# Altium PCB A4.PcbDoc (part 2 of 2)
Units mil, origin at the board's own origin, x right, y up, seen from the top; angles counter-clockwise.
Board outline 3937.01 x 3149.61 mil, 2 copper layers (Top Layer, Bottom Layer); 93 components, 53 nets, 268 pads, 22 vias.
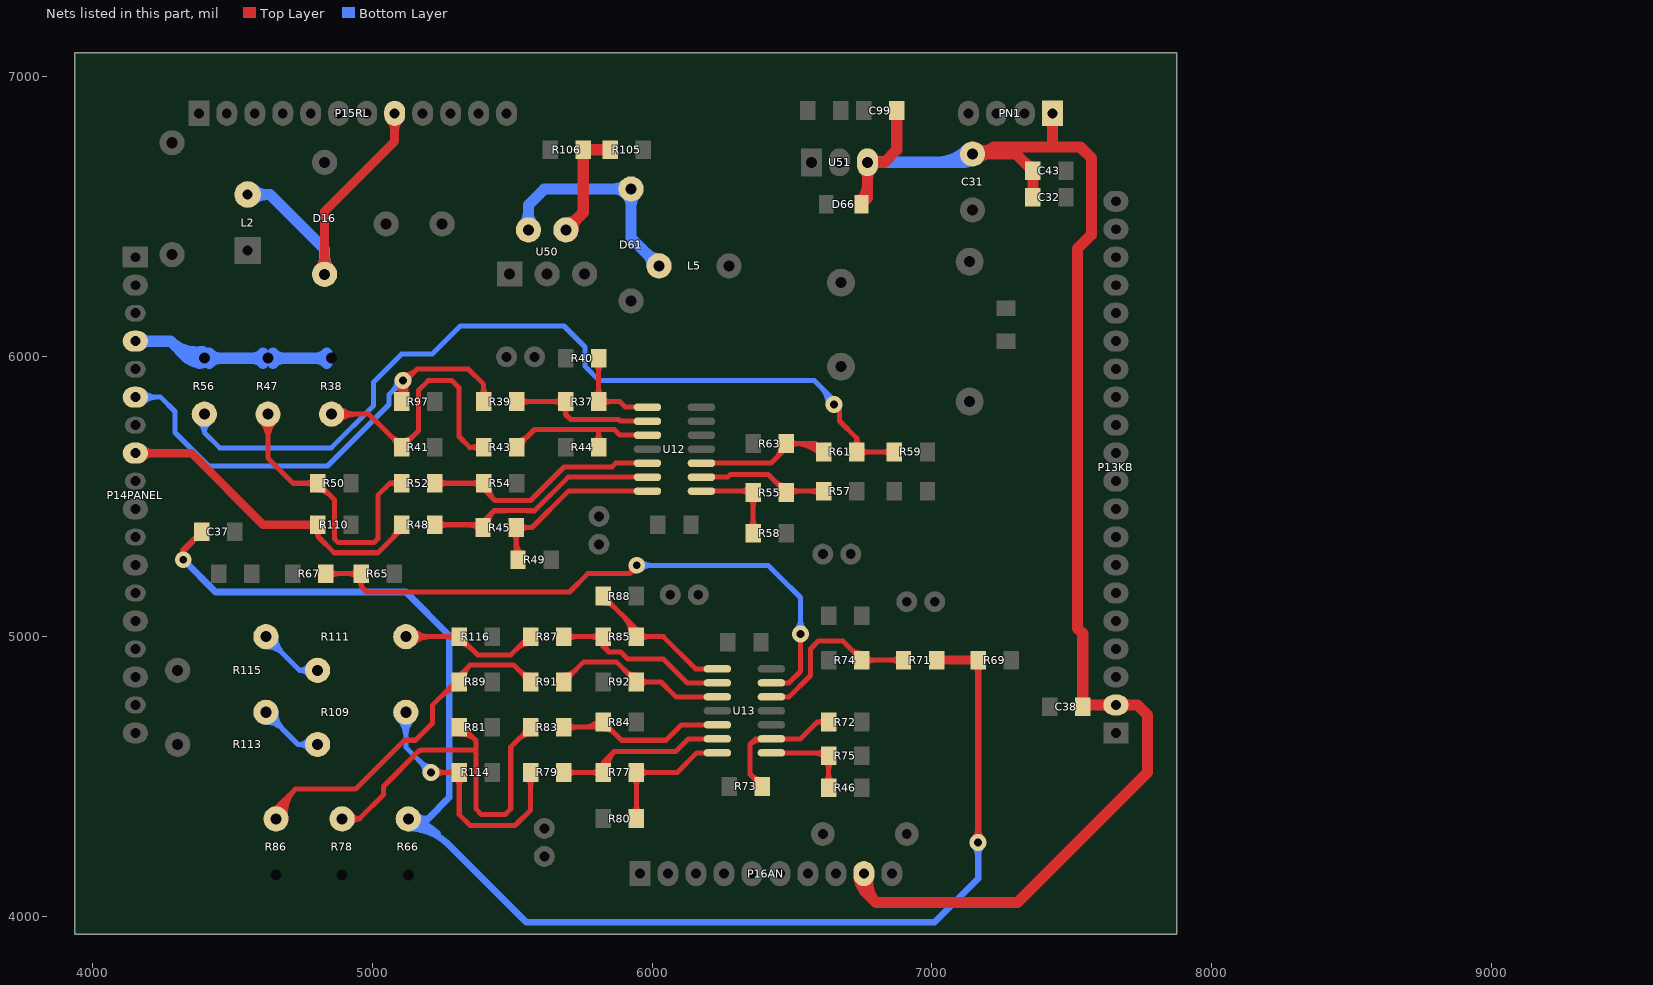
[diagram p2: the nets of this part, all layers, seen from the top]

## Via types
v1: diameter 60, hole 28, Top Layer to Bottom Layer, 21 vias
v2: diameter 90, hole 39.37, Top Layer to Bottom Layer, 1 vias

## Nets (pads, with @x,y where several pads share a name; then routed paths per layer and width w, separated by ;. In a path a pad name is that pad's centre, name@x,y a point inside that pad or via, vN(x,y) a via of type N, cw(c..) or ccw(c..) an arc to the next point about the centre after c; other vN are vias at no path point) (continued)
N: P14PANEL.4 R38.1 R47.1 R56.1 | length 2412
  Bottom Layer w40: P14PANEL.4@4153.54,6055.91 4279.09,6055.91 ; P14PANEL.4@4173.42,6043.53 cw(c4203.29,6013.66) 4203.29,6055.91 cw(c4203.29,6098.15) P14PANEL.4@4173.42,6068.28 ; 4333.02,6001.98 ccw(c4388.58,6057.53) R56.1@4402.7,5980.24 ; R56.1@4382.25,5977.4 ccw(c4340,5935.51) 4340,5995 ; R56.1@4382.25,6012.6 cw(c4340,6054.49) 4340,5995 ; R56.1@4395.51,6019.59 cw(c4371.92,6148.72) 4279.1,6055.9 ; R56.1@4417.68,5977.32 cw(c4460.36,5934.64) 4460.36,5995 cw(c4460.36,6055.36) R56.1@4417.68,6012.68 ; R47.1@4609.82,5977.32 ccw(c4567.14,5934.64) 4567.14,5995 ccw(c4567.14,6055.36) R47.1@4609.82,6012.68 ; R38.1@4850,5995 R47.1@4627.5,5995 R56.1@4400,5995 4340,5995 ; 4279.09,6055.91 4340,5995 ; R47.1@4645.18,5977.32 cw(c4687.86,5934.64) 4687.86,5995 ; R47.1@4645.18,5977.32 cw(c4687.86,5934.64) 4687.86,5995 ; R47.1@4645.18,5977.32 cw(c4687.86,5934.64) 4687.86,5995 ; R47.1@4645.18,5977.32 cw(c4687.86,5934.64) 4687.86,5995 ; R47.1@4645.18,5977.32 cw(c4687.86,5934.64) 4687.86,5995 ; R47.1@4645.18,5977.32 cw(c4687.86,5934.64) 4687.86,5995 ; R47.1@4645.18,6012.68 ccw(c4687.86,6055.36) 4687.86,5995 ; R47.1@4645.18,6012.68 ccw(c4687.86,6055.36) 4687.86,5995 ; R47.1@4645.18,6012.68 ccw(c4687.86,6055.36) 4687.86,5995 ; R47.1@4645.18,6012.68 ccw(c4687.86,6055.36) 4687.86,5995 ; R47.1@4645.18,6012.68 ccw(c4687.86,6055.36) 4687.86,5995 ; R47.1@4645.18,6012.68 ccw(c4687.86,6055.36) 4687.86,5995 ; 4794.64,5995 ccw(c4794.64,6055.36) R38.1@4837.32,6012.68 ; 4794.64,5995 cw(c4794.64,5934.64) R38.1@4837.32,5977.32 ; 4794.64,5995 ccw(c4794.64,6055.36) R38.1@4837.32,6012.68 ; 4794.64,5995 cw(c4794.64,5934.64) R38.1@4837.32,5977.32 ; 4794.64,5995 ccw(c4794.64,6055.36) R38.1@4837.32,6012.68 ; 4794.64,5995 cw(c4794.64,5934.64) R38.1@4837.32,5977.32 ; 4794.64,5995 ccw(c4794.64,6055.36) R38.1@4837.32,6012.68 ; 4794.64,5995 cw(c4794.64,5934.64) R38.1@4837.32,5977.32 ; 4794.64,5995 ccw(c4794.64,6055.36) R38.1@4837.32,6012.68 ; 4794.64,5995 cw(c4794.64,5934.64) R38.1@4837.32,5977.32 ; 4794.64,5995 ccw(c4794.64,6055.36) R38.1@4837.32,6012.68 ; 4794.64,5995 cw(c4794.64,5934.64) R38.1@4837.32,5977.32
NetC37_1: C37.1 R66.2 R69.1 R71.2 | length 5620.3
  Top Layer w24: v1(4325,5275) 4325,5309.06 C37.1@4390.94,5375 ; v1@7152.27,4277.73 ccw(c7121.54,4308.46) 7165,4308.46 ccw(c7208.46,4308.46) v1@7177.73,4277.73 ; R69.1@7154.94,4899.34 cw(c7130.66,4875.06) 7165,4875.06 ; v1@7160,4280 7165,4285 7165,4915.31 R69.1@7165.94,4916.25 ; 7165,4870.5 cw(c7205.79,4870.5) R69.1@7176.95,4899.34
  Top Layer w32: R71.2@7016.56,4916.25 R69.1@7165.94,4916.25 ; R71.2@7024.73,4908.08 cw(c7044.46,4888.34) 7044.46,4916.25 cw(c7044.46,4944.16) R71.2@7024.73,4924.42 ; R69.1@7157.77,4908.08 ccw(c7138.04,4888.34) 7138.04,4916.25 ccw(c7138.04,4944.16) R69.1@7157.77,4924.42
  Bottom Layer w24: v1(4325,5275) 4440,5160 5120,5160 5275,5005 5275,4425 5199.13,4349.13 R66.2@5128.82,4349.13 ; R66.2@5128.82,4316.13 cw(c5128.82,4110.81) 5274,4256 5550,3980 7010,3980 7165,4135 7165,4221.54 ; R66.2@5128.82,4340.13 cw(c5128.82,4192.75) 5233.03,4296.97 ; R66.2@5128.82,4364.13 cw(c5128.82,4274.69) 5192.06,4337.94 ; R66.2@5158.67,4335.06 cw(c5180.86,4324.59) 5180.86,4349.13 cw(c5180.86,4373.68) R66.2@5158.67,4363.21 ; v1@7152.27,4252.27 cw(c7121.54,4221.54) 7165,4221.54 ; v1(7165,4265) 7165,4221.54 ; v1@7177.73,4252.27 ccw(c7208.46,4221.54) 7165,4221.54
NetD61_2: D61.2 L5.1 U50.2 | length 1175.5
  Bottom Layer w40: U50.2@5540.39,6471.42 ccw(c5497.72,6514.1) 5558.07,6514.1 ccw(c5618.43,6514.1) U50.2@5575.75,6471.42 ; U50.2@5558.07,6453.74 5558.07,6543.07 5615,6600 D61.2@5925,6600 5925,6425 L5.1@6025,6325 ; D61.2@5907.32,6617.68 cw(c5864.64,6660.36) 5864.64,6600 cw(c5864.64,6539.64) 5907.32,6582.32 cw(c5864.64,6539.64) 5925,6539.64 cw(c5985.36,6539.64) D61.2@5942.68,6582.32 ; L5.1@6000,6325 ccw(c5939.64,6325) 5982.32,6367.68 ccw(c6025,6410.36) L5.1@6025,6350
NetR37_1: R37.1 R40.2 U12.1 | length 548.9
  Top Layer w18: R37.1@5795.93,5859.03 ccw(c5764.25,5890.71) 5809.06,5890.71 ccw(c5853.86,5890.71) R37.1@5822.18,5859.03 ; R40.2@5795.93,5975.97 cw(c5764.25,5944.29) 5809.06,5944.29 cw(c5853.86,5944.29) R40.2@5822.18,5975.97 ; R40.2@5809.06,5995 R37.1@5809.06,5840 5885,5840 5905,5820 U12.1@5983.54,5820 ; R37.1@5822.18,5826.88 cw(c5853.86,5795.19) 5853.86,5840 cw(c5853.86,5884.81) R37.1@5822.18,5853.12
NetR37_2: R37.2 R39.1 U12.2 | length 722.5
  Top Layer w18: R39.1@5516.56,5840 R37.2@5690.94,5840 5690.94,5794.06 ; R39.1@5529.68,5826.88 cw(c5561.36,5795.19) 5561.36,5840 cw(c5561.36,5884.81) R39.1@5529.68,5853.12 ; R37.2@5677.82,5826.88 ccw(c5646.14,5795.19) 5646.14,5840 ccw(c5646.14,5884.81) R37.2@5677.82,5853.12 ; R37.2@5678.95,5819.93 cw(c5657.04,5794.06) 5690.94,5794.06 ; R37.2@5702.94,5819.93 ccw(c5724.85,5794.06) 5690.94,5794.06 ; U12.2@5983.54,5770 5885.91,5770 5879.91,5776 5709,5776 5690.94,5794.06
NetR38_2: R38.2 R41.1 R43.2 | length 1395.1
  Top Layer w18: R38.2@4855,5795 4987.61,5795 5017.61,5765 5042.61,5740 R41.1@5105.94,5676.67 5165,5735.72 5165,5880.15 5199.85,5915 5285,5915 5310,5890 5310,5715 5348.33,5676.67 R43.2@5398.44,5676.67 ; R38.2@4880.46,5769.54 cw(c4941.91,5708.09) 4941.91,5795 cw(c4941.91,5881.91) R38.2@4880.46,5820.46 ; R41.1@5124.5,5682.57 cw(c5155.05,5682.57) R41.1@5133.45,5704.17 ; 5147.71,5718.43 cw(c5105.94,5760.19) R41.1@5105.94,5701.13 ; R43.2@5385.32,5663.54 ccw(c5353.64,5631.86) 5353.64,5676.67 ccw(c5353.64,5721.47) R43.2@5385.32,5689.79 ; R41.1@5105.94,5701.13 cw(c5105.94,5760.19) 5064.18,5718.43 ccw(c5105.94,5760.19) R41.1@5105.94,5701.13 ; R41.1@5078.44,5704.17 cw(c5056.84,5682.57) 5087.39,5682.57 ccw(c5056.84,5682.57) R41.1@5078.44,5704.17
NetR43_1: R43.1 R44.2 U12.3 | length 706
  Top Layer w18: R43.1@5516.56,5676.67 5579.89,5740 5810,5740 ; R43.1@5516.56,5701.13 ccw(c5516.55,5760.19) 5558.32,5718.43 ; R43.1@5535.12,5682.57 cw(c5565.66,5682.57) R43.1@5544.06,5704.17 ; R44.2@5795.93,5695.69 ccw(c5764.25,5727.38) 5809.06,5727.38 ccw(c5853.86,5727.38) R44.2@5822.18,5695.69 ; R44.2@5809.06,5676.67 5809.06,5739.06 5810,5740 ; U12.3@5983.54,5720 5885,5720 5865,5740 5810,5740
NetR45_1: R45.1 R49.2 U12.7 | length 1284.9
  Top Layer w18: R49.2@5514.06,5261.89 R45.1@5514.06,5390 5570.91,5390 5700.91,5520 U12.7@5983.54,5520 ; R45.1@5527.18,5376.88 cw(c5558.86,5345.19) 5558.86,5390 cw(c5558.86,5434.81) R45.1@5527.18,5403.12 ; R45.1@5500.93,5370.97 cw(c5469.25,5339.29) 5514.06,5339.29 ; R45.1@5500.93,5370.97 cw(c5469.25,5339.29) 5514.06,5339.29 ; R45.1@5500.93,5370.97 cw(c5469.25,5339.29) 5514.06,5339.29 ; R45.1@5500.93,5370.97 cw(c5469.25,5339.29) 5514.06,5339.29 ; R49.2@5507.82,5294.03 ccw(c5492.77,5309.08) 5514.06,5309.08 ; R49.2@5507.82,5294.03 ccw(c5492.77,5309.08) 5514.06,5309.08 ; R49.2@5507.82,5294.03 ccw(c5492.77,5309.08) 5514.06,5309.08 ; R49.2@5507.82,5294.03 ccw(c5492.77,5309.08) 5514.06,5309.08 ; 5514.06,5339.29 cw(c5558.86,5339.29) R45.1@5527.18,5370.97 ; 5514.06,5339.29 cw(c5558.86,5339.29) R45.1@5527.18,5370.97 ; 5514.06,5339.29 cw(c5558.86,5339.29) R45.1@5527.18,5370.97 ; 5514.06,5339.29 cw(c5558.86,5339.29) R45.1@5527.18,5370.97 ; 5514.06,5342.34 ccw(c5582.38,5342.34) R49.2@5534.07,5294.03 ; 5514.06,5342.34 ccw(c5582.38,5342.34) R49.2@5534.07,5294.03 ; 5514.06,5342.34 ccw(c5582.38,5342.34) R49.2@5534.07,5294.03 ; 5514.06,5342.34 ccw(c5582.38,5342.34) R49.2@5534.07,5294.03
NetR45_2: R45.2 R48.1 U12.6 | length 2041.7
  Top Layer w18: R48.1@5216.56,5400 R48.1@5224.06,5400 R45.2@5395.94,5400 ; R45.2@5395.94,5390 R45.2@5395.94,5400 ; R45.2@5398.44,5400 R45.2@5395.94,5400 ; R45.2@5414.48,5396.82 cw(c5484.73,5400.26) 5435,5450 ; U12.6@5983.54,5570 5700,5570 5580,5450 5553.26,5450 5553.26,5450.46 5475.31,5450.46 5474.85,5450 5435,5450 ; R48.1@5237.18,5386.88 cw(c5268.86,5355.19) 5268.86,5400 ; R48.1@5237.18,5386.88 cw(c5268.86,5355.19) 5268.86,5400 ; R48.1@5237.18,5386.88 cw(c5268.86,5355.19) 5268.86,5400 ; R48.1@5237.18,5386.88 cw(c5268.86,5355.19) 5268.86,5400 ; R48.1@5237.18,5386.88 cw(c5268.86,5355.19) 5268.86,5400 ; R48.1@5237.18,5386.88 cw(c5268.86,5355.19) 5268.86,5400 ; R48.1@5237.18,5386.88 cw(c5268.86,5355.19) 5268.86,5400 ; R48.1@5237.18,5386.88 cw(c5268.86,5355.19) 5268.86,5400 ; R48.1@5237.18,5413.12 ccw(c5268.86,5444.81) 5268.86,5400 ; R48.1@5237.18,5413.12 ccw(c5268.86,5444.81) 5268.86,5400 ; R48.1@5237.18,5413.12 ccw(c5268.86,5444.81) 5268.86,5400 ; R48.1@5237.18,5413.12 ccw(c5268.86,5444.81) 5268.86,5400 ; R48.1@5237.18,5413.12 ccw(c5268.86,5444.81) 5268.86,5400 ; R48.1@5237.18,5413.12 ccw(c5268.86,5444.81) 5268.86,5400 ; R48.1@5237.18,5413.12 ccw(c5268.86,5444.81) 5268.86,5400 ; R48.1@5237.18,5413.12 ccw(c5268.86,5444.81) 5268.86,5400 ; 5341.25,5400 cw(c5341.25,5341.22) R45.2@5382.82,5382.78 ; 5341.25,5400 cw(c5341.25,5341.22) R45.2@5382.82,5382.78 ; 5341.25,5400 cw(c5341.25,5341.22) R45.2@5382.82,5382.78 ; 5341.25,5400 cw(c5341.25,5341.22) R45.2@5382.82,5382.78 ; 5341.25,5400 cw(c5341.25,5341.22) R45.2@5382.82,5382.78 ; 5341.25,5400 cw(c5341.25,5341.22) R45.2@5382.82,5382.78 ; 5341.25,5400 cw(c5341.25,5341.22) R45.2@5382.82,5382.78 ; 5341.25,5400 cw(c5341.25,5341.22) R45.2@5382.82,5382.78 ; 5361.02,5400 ccw(c5361.02,5430.83) R45.2@5382.82,5409.03 ; 5361.02,5400 ccw(c5361.02,5430.83) R45.2@5382.82,5409.03 ; 5361.02,5400 ccw(c5361.02,5430.83) R45.2@5382.82,5409.03 ; 5361.02,5400 ccw(c5361.02,5430.83) R45.2@5382.82,5409.03 ; 5361.02,5400 ccw(c5361.02,5430.83) R45.2@5382.82,5409.03 ; 5361.02,5400 ccw(c5361.02,5430.83) R45.2@5382.82,5409.03 ; 5361.02,5400 ccw(c5361.02,5430.83) R45.2@5382.82,5409.03 ; 5361.02,5400 ccw(c5361.02,5430.83) R45.2@5382.82,5409.03 ; R45.2@5395.94,5400 5395.94,5410.94 5435,5450
NetR46_1: R46.1 R75.1 U13.8 | length 552.6
  Top Layer w18: U13.8@6426.46,4585 6617.19,4585 6630.94,4571.25 R46.1@6630.94,4460 R46.1@6630.94,4440 ; 6576.25,4585 cw(c6576.25,4526.22) R75.1@6617.82,4567.78 ; 6596.02,4585 ccw(c6596.02,4615.83) R75.1@6617.82,4594.03 ; R46.1@6617.82,4479.03 ccw(c6586.14,4510.71) 6630.94,4510.71 ccw(c6675.75,4510.71) R46.1@6644.07,4479.03 ; R75.1@6617.82,4555.97 cw(c6586.14,4524.29) 6630.94,4524.29 cw(c6675.75,4524.29) R75.1@6644.07,4555.97
NetR47_2: R47.2 R50.1 R52.2 | length 1363.6
  Top Layer w18: R47.2@4602.04,5769.54 cw(c4540.59,5708.09) 4627.5,5708.09 cw(c4714.41,5708.09) R47.2@4652.96,5769.54 ; R47.2@4627.5,5795 4627.5,5637.5 4716.67,5548.33 R50.1@4805.94,5548.33 4865,5489.28 4865,5350 4879,5336 5006,5336 5020,5350 5020,5505 5063.33,5548.33 ; R50.1@4792.82,5535.21 ccw(c4761.14,5503.53) 4761.14,5548.33 ccw(c4761.14,5593.14) R50.1@4792.82,5561.46 ; R50.1@4805.94,5523.87 cw(c4805.94,5464.81) 4847.71,5506.57 ; R50.1@4824.5,5542.43 ccw(c4855.05,5542.43) R50.1@4833.45,5520.83 ; R52.2@5092.35,5535.69 ccw(c5063.34,5508.7) 5063.34,5548.33 ; R52.2@5092.35,5560.97 cw(c5063.34,5587.96) 5063.34,5548.33 ; R52.2@5105.94,5548.33 5063.33,5548.33
NetR52_1: R52.1 R54.2 U12.5 | length 1093.5
  Top Layer w18: R52.1@5216.56,5548.33 R52.1@5224.06,5548.33 R54.2@5398.44,5548.33 5398.44,5526.56 5439,5486 ; R52.1@5237.18,5535.21 cw(c5268.86,5503.53) 5268.86,5548.33 cw(c5268.86,5593.14) R52.1@5237.18,5561.46 ; R54.2@5385.32,5535.21 ccw(c5353.64,5503.53) 5353.64,5548.33 ccw(c5353.64,5593.14) R54.2@5385.32,5561.46 ; R54.2@5399,5542.41 ccw(c5435.55,5541.16) R54.2@5409.69,5515.31 ; R54.2@5416.99,5541.8 ccw(c5492.23,5539.23) 5439,5486 ; U12.5@5983.54,5620 5870,5620 5856,5606 5685.09,5606 5565.55,5486.46 5460.4,5486.46 5459.94,5486 5439,5486
NetR55_1: R55.1 R58.2 U12.8 | length 542.7
  Top Layer w18: U12.8@6176.46,5520 6355.94,5520 R55.1@6360.94,5515 R58.2@6360.94,5370 ; 6313.95,5520 ccw(c6313.95,5567.9) R55.1@6347.82,5534.03 ; 6318.32,5520 cw(c6318.32,5478.29) R55.1@6347.82,5507.78 ; R58.2@6347.82,5389.03 ccw(c6316.14,5420.71) 6360.94,5420.71 ccw(c6405.75,5420.71) R58.2@6374.07,5389.03 ; R55.1@6347.82,5495.97 cw(c6316.14,5464.29) 6360.94,5464.29 cw(c6405.75,5464.29) R55.1@6374.07,5495.97
NetR55_2: R55.2 R57.1 U12.9 | length 681.3
  Top Layer w18: U12.9@6176.46,5570 6270,5570 6280,5580 6414.06,5580 R55.2@6479.06,5515 6484.06,5520 R57.1@6613.44,5520 ; 6437.29,5556.76 ccw(c6479.06,5598.53) R55.2@6479.06,5539.46 ; R55.2@6451.55,5542.51 cw(c6429.95,5520.91) R55.2@6460.5,5520.91 ; R55.2@6492.18,5507.78 cw(c6521.68,5478.29) 6521.68,5520 ; R55.2@6492.18,5534.03 ccw(c6526.05,5567.9) 6526.05,5520 ; R57.1@6600.32,5506.88 ccw(c6568.64,5475.19) 6568.64,5520 ccw(c6568.64,5564.81) R57.1@6600.32,5533.12
NetR56_2: R56.2 R59.1 R61.2 | length 3464
  Top Layer w18: v1(6650,5830) 6670,5810 6670,5770.91 6731.56,5709.36 ; R61.2@6718.72,5679.31 ccw(c6689.98,5709.35) 6731.56,5709.35 ; R61.2@6744.39,5679.31 cw(c6773.13,5709.35) 6731.56,5709.35 ; R61.2@6744.68,5646.88 cw(c6776.36,5615.19) 6776.36,5660 cw(c6776.36,5704.81) R61.2@6744.68,5673.12 ; R59.1@6852.82,5646.88 ccw(c6821.14,5615.19) 6821.14,5660 ccw(c6821.14,5704.81) R59.1@6852.82,5673.12 ; R59.1@6865.94,5660 R61.2@6731.56,5660 6731.56,5709.36
  Bottom Layer w18: R56.2@4380.9,5764.48 cw(c4359.32,5730) 4400,5730 ; R56.2@4400,5795 4400,5730 ; R56.2@4419.1,5764.48 ccw(c4440.68,5730) 4400,5730 ; 6603.54,5891.46 cw(c6542.09,5830) v1@6629,5830 ; 6634.27,5860.73 cw(c6603.54,5830) v1@6647,5830 ; v1(6650,5830) 6650,5845 6580,5915 5810.91,5915 5760,5965.91 5760,6035 5685,6110 5670.91,6110 5669.91,6111 5640.09,6111 5639.09,6110 5315,6110 5215,6010 5105,6010 5005,5910 5005,5825.91 4854.09,5675 4455,5675 4400,5730
NetR61_1: R61.1 R63.2 U12.10 | length 844.8
  Top Layer w18: U12.10@6176.46,5620 6425,5620 6479.06,5674.06 R63.2@6479.06,5690 6583.44,5690 ; 6440.28,5635.28 ccw(c6391.46,5684.09) R63.2@6460.5,5684.09 ; R63.2@6464.51,5659.51 cw(c6479.06,5644.97) R63.2@6479.06,5665.54 ; R63.2@6492.18,5676.88 cw(c6523.86,5645.19) 6523.86,5690 cw(c6523.86,5734.81) R63.2@6492.18,5703.12 ; 6510.47,5690 cw(c6510.47,5562.93) R61.1@6600.32,5652.78 ; 6553.93,5690 cw(c6553.93,5606.39) R61.1@6613.05,5665.51 ; R61.1@6585.94,5687.51 cw(c6564.34,5665.91) R61.1@6594.89,5665.91 ; R61.1@6608.19,5683.7 cw(c6601.11,5707.66) 6583.45,5690 ; R61.1@6613.44,5660 6583.44,5690
NetR65_2: R65.2 R67.1 U13.13 | length 2706.5
  Top Layer w18: R67.1@4834.06,5225 R65.2@4960.94,5225 4960.94,5179.06 ; R67.1@4847.18,5211.88 cw(c4878.86,5180.19) 4878.86,5225 cw(c4878.86,5269.81) R67.1@4847.18,5238.12 ; R65.2@4947.82,5211.88 ccw(c4916.14,5180.19) 4916.14,5225 ccw(c4916.14,5269.81) R65.2@4947.82,5238.12 ; R65.2@4948.95,5204.93 cw(c4927.04,5179.06) 4960.94,5179.06 ; R65.2@4972.94,5204.93 ccw(c4994.85,5179.06) 4960.94,5179.06 ; v1(5945,5255) 5945,5260 5950,5255 5920,5225 ; U13.13@6426.46,4835 6489,4835 6530,4876 v1(6530,5010) ; 4960.94,5179.06 4980,5160 5705,5160 5770,5225 5920,5225 ; 5920,5225 ccw(c5904.38,5240.62) 5925.2,5247.99 cw(c5904.38,5240.62) 5920,5225 ; 5920,5225 cw(c5941.94,5203.06) 5943.77,5234.04 ccw(c5941.94,5203.06) 5920,5225
  Bottom Layer w18: v1(5945,5255) 5945,5260 5950,5255 6414.39,5255 6451.39,5218 6452,5218 6530,5140 v1(6530,5010) ; v1@5959.85,5240.15 cw(c5995.7,5204.3) 5995.7,5255 cw(c5995.7,5305.7) v1@5959.85,5269.85 ; v1@6515.15,5024.85 ccw(c6479.3,5060.7) 6530,5060.7 ccw(c6580.7,5060.7) v1@6544.85,5024.85
NetR71_1: R71.1 R74.2 U13.12 | length 850
  Top Layer w18: U13.12@6426.46,4785 6489.91,4785 6566,4861.09 6566,4915 6566,4956 6595,4985 6680.31,4985 R74.2@6749.06,4916.25 R71.1@6898.44,4916.25 ; 6707.29,4958.01 ccw(c6749.06,4999.78) R74.2@6749.06,4940.71 ; R74.2@6721.55,4943.76 cw(c6699.95,4922.16) R74.2@6730.5,4922.16 ; R74.2@6762.18,4903.13 cw(c6793.86,4871.44) 6793.86,4916.25 cw(c6793.86,4961.06) R74.2@6762.18,4929.37 ; R71.1@6885.32,4903.13 ccw(c6853.64,4871.44) 6853.64,4916.25 ccw(c6853.64,4961.06) R71.1@6885.32,4929.37
NetR72_1: R72.1 R73.2 U13.9 | length 658.6
  Top Layer w18: 6352.29,4506.76 ccw(c6394.06,4548.53) R73.2@6394.06,4489.46 ; R73.2@6366.55,4492.51 cw(c6344.95,4470.91) R73.2@6375.5,4470.91 ; U13.9@6390.69,4630.23 ccw(c6387.07,4577.93) 6350,4615 ; R73.2@6394.06,4465 6350,4509.06 6350,4615 ; R72.1@6616.99,4682.77 ccw(c6590,4659.12) 6590,4695 ; R72.1@6616.99,4707.23 cw(c6590,4730.88) 6590,4695 ; R72.1@6630.94,4695 6590,4695 ; 6350,4615 6370,4635 U13.9@6426.46,4635 6530,4635 6590,4695
NetR77_1: R77.1 R80.2 U13.7 | length 694.6
  Top Layer w18: R80.2@5930.93,4369.03 ccw(c5899.25,4400.71) 5944.06,4400.71 ccw(c5988.86,4400.71) R80.2@5957.18,4369.03 ; R77.1@5930.93,4495.97 cw(c5899.25,4464.29) 5944.06,4464.29 cw(c5988.86,4464.29) R77.1@5957.18,4495.97 ; R80.2@5944.06,4350 R77.1@5944.06,4515 6090,4515 6160,4585 U13.7@6233.54,4585 ; R77.1@5957.18,4501.88 cw(c5988.86,4470.19) 5988.86,4515 cw(c5988.86,4559.81) R77.1@5957.18,4528.12
NetR77_2: R77.2 R79.1 U13.6 | length 914.6
  Top Layer w18: R79.1@5684.06,4515 R77.2@5825.94,4515 5825.94,4550.94 ; R79.1@5697.18,4501.88 cw(c5728.86,4470.19) 5728.86,4515 cw(c5728.86,4559.81) R79.1@5697.18,4528.12 ; R77.2@5812.82,4501.88 ccw(c5781.14,4470.19) 5781.14,4515 ccw(c5781.14,4559.81) R77.2@5812.82,4528.12 ; R77.2@5817.64,4537.5 ccw(c5810.92,4550.94) 5825.94,4550.94 ; R77.2@5826.49,4521 cw(c5876.31,4529.78) 5840.54,4565.54 ; R77.2@5834.25,4537.5 cw(c5840.97,4550.94) 5825.94,4550.94 ; R77.2@5844.22,4524.13 cw(c5917.89,4537.1) 5865,4590 ; U13.6@6233.54,4635 6130,4635 6085,4590 5865,4590 ; 5825.94,4550.94 5865,4590
NetR78_2: R78.2 R81.1 R83.2 | length 1624.1
  Top Layer w18: R78.2@4892.6,4349.13 4954.13,4349.13 ; R78.2@4923.98,4331.49 cw(c4954.13,4314.54) 4954.13,4349.13 ; R78.2@4923.98,4366.77 ccw(c4954.13,4383.72) 4954.13,4349.13 ; R81.1@5310.97,4670.2 cw(c5313.14,4630.19) 5341.48,4658.52 ; R81.1@5310.94,4676.67 5323.33,4676.67 5370,4630 ; R81.1@5311.95,4652.23 cw(c5316.07,4576.08) 5370,4630 ; 5524.18,4634.9 cw(c5565.94,4593.14) R83.2@5565.94,4652.2 ; R83.2@5538.44,4649.16 ccw(c5516.84,4670.76) R83.2@5547.39,4670.76 ; R83.2@5565.94,4676.67 5495,4605.72 5495,4490 5495,4460 5495,4385 5475,4365 5390,4365 5370,4385 5370,4465 5370,4510 5370,4595 ; 4954.13,4349.13 5040,4435 5040,4465 5169,4594 5174.91,4594 5175.91,4595 5370,4595 ; 5370,4595 5370,4630
NetR79_2: R79.2 R109.2 R114.2 | length 1439.5
  Top Layer w18: v1(5210,4515) R114.2@5310.94,4515 5310.94,4364.06 5350,4325 5510,4325 5565.94,4380.94 R79.2@5565.94,4515 ; v1@5224.85,4500.15 cw(c5260.7,4464.3) 5260.7,4515 cw(c5260.7,4565.7) v1@5224.85,4529.85 ; R114.2@5297.82,4495.97 cw(c5266.14,4464.29) 5310.94,4464.29 cw(c5355.75,4464.29) R114.2@5324.07,4495.97 ; R114.2@5297.82,4501.88 ccw(c5266.14,4470.19) 5266.14,4515 ccw(c5266.14,4559.81) R114.2@5297.82,4528.12 ; R79.2@5552.82,4495.97 cw(c5521.14,4464.29) 5565.94,4464.29 cw(c5610.75,4464.29) R79.2@5579.07,4495.97
  Bottom Layer w18: R109.2@5094.54,4704.54 cw(c5033.09,4643.09) 5120,4643.09 cw(c5206.91,4643.09) R109.2@5145.46,4704.54 ; R109.2@5120,4730 5120,4605 v1(5210,4515) ; v1@5189,4515 ccw(c5138.3,4515) 5174.15,4550.85 ccw(c5210,4586.7) v1@5210,4536
NetR83_1: R83.1 R84.2 U13.5 | length 1882.6
  Top Layer w18: R83.1@5684.06,4676.67 R84.2@5825.94,4676.67 ; R84.2@5825.94,4670.54 cw(c5825.94,4611.47) 5867.71,4653.24 ; R84.2@5825.94,4695 5890.94,4630 6050,4630 6105,4685 U13.5@6233.54,4685 ; R84.2@5844.5,4689.09 ccw(c5875.05,4689.09) R84.2@5853.45,4667.49 ; R83.1@5697.18,4663.54 cw(c5728.86,4631.86) 5728.86,4676.67 ; R83.1@5697.18,4663.54 cw(c5728.86,4631.86) 5728.86,4676.67 ; R83.1@5697.18,4663.54 cw(c5728.86,4631.86) 5728.86,4676.67 ; R83.1@5697.18,4663.54 cw(c5728.86,4631.86) 5728.86,4676.67 ; R83.1@5697.18,4663.54 cw(c5728.86,4631.86) 5728.86,4676.67 ; R83.1@5697.18,4663.54 cw(c5728.86,4631.86) 5728.86,4676.67 ; R83.1@5697.18,4663.54 cw(c5728.86,4631.86) 5728.86,4676.67 ; R83.1@5697.18,4689.79 ccw(c5728.86,4721.47) 5728.86,4676.67 ; R83.1@5697.18,4689.79 ccw(c5728.86,4721.47) 5728.86,4676.67 ; R83.1@5697.18,4689.79 ccw(c5728.86,4721.47) 5728.86,4676.67 ; R83.1@5697.18,4689.79 ccw(c5728.86,4721.47) 5728.86,4676.67 ; R83.1@5697.18,4689.79 ccw(c5728.86,4721.47) 5728.86,4676.67 ; R83.1@5697.18,4689.79 ccw(c5728.86,4721.47) 5728.86,4676.67 ; R83.1@5697.18,4689.79 ccw(c5728.86,4721.47) 5728.86,4676.67 ; 5751.13,4676.67 ccw(c5751.13,4763.9) R84.2@5812.82,4702.22 ; 5751.13,4676.67 ccw(c5751.13,4763.9) R84.2@5812.82,4702.22 ; 5751.13,4676.67 ccw(c5751.13,4763.9) R84.2@5812.82,4702.22 ; 5751.13,4676.67 ccw(c5751.13,4763.9) R84.2@5812.82,4702.22 ; 5751.13,4676.67 ccw(c5751.13,4763.9) R84.2@5812.82,4702.22 ; 5751.13,4676.67 ccw(c5751.13,4763.9) R84.2@5812.82,4702.22 ; 5751.13,4676.67 ccw(c5751.13,4763.9) R84.2@5812.82,4702.22 ; 5794.59,4676.67 ccw(c5794.59,4720.45) R84.2@5825.55,4689.49 ; 5794.59,4676.67 ccw(c5794.59,4720.45) R84.2@5825.55,4689.49 ; 5794.59,4676.67 ccw(c5794.59,4720.45) R84.2@5825.55,4689.49 ; 5794.59,4676.67 ccw(c5794.59,4720.45) R84.2@5825.55,4689.49 ; 5794.59,4676.67 ccw(c5794.59,4720.45) R84.2@5825.55,4689.49 ; 5794.59,4676.67 ccw(c5794.59,4720.45) R84.2@5825.55,4689.49 ; 5794.59,4676.67 ccw(c5794.59,4720.45) R84.2@5825.55,4689.49
NetR85_1: R85.1 R88.2 U13.1 | length 787.6
  Top Layer w18: R88.2@5825.94,5120.54 cw(c5825.94,5061.47) 5867.71,5103.24 ; R88.2@5825.94,5145 5944.06,5026.89 R85.1@5944.06,5000 6040,5000 6155,4885 U13.1@6233.54,4885 ; R88.2@5844.5,5139.09 ccw(c5875.05,5139.09) R88.2@5853.45,5117.49 ; 5897.54,5073.41 cw(c5830.04,5005.91) R85.1@5925.5,5005.91 ; 5928.26,5042.68 cw(c5891.49,5005.91) R85.1@5943.5,5005.91 ; R85.1@5957.18,4986.88 cw(c5988.86,4955.19) 5988.86,5000 cw(c5988.86,5044.81) R85.1@5957.18,5013.12
NetR85_2: R85.2 R87.1 U13.2 | length 889.4
  Top Layer w18: R87.1@5684.06,5000 R85.2@5825.94,5000 5825.94,4964.06 ; R87.1@5697.18,4986.88 cw(c5728.86,4955.19) 5728.86,5000 cw(c5728.86,5044.81) R87.1@5697.18,5013.12 ; R85.2@5812.82,4986.88 ccw(c5781.14,4955.19) 5781.14,5000 ccw(c5781.14,5044.81) R85.2@5812.82,5013.12 ; R85.2@5817.64,4977.5 cw(c5810.92,4964.06) 5825.94,4964.06 ; R85.2@5826.4,4993.77 ccw(c5847,4978.92) 5829.04,4960.96 ; R85.2@5834.25,4977.5 ccw(c5840.97,4964.06) 5825.94,4964.06 ; R85.2@5841,4983.24 ccw(c5864.38,4966.38) 5844,4946 ; U13.2@6233.54,4835 6125,4835 6040,4920 5913.3,4920 5887.3,4946 5844,4946 ; 5825.94,4964.06 5844,4946
NetR86_2: R86.2 R89.1 R91.2 | length 1769.8
  Top Layer w18: R86.2@4674.18,4351.83 cw(c4764.16,4365.45) 4699.8,4429.8 ; 4674.61,4404.61 ccw(c4720.4,4358.83) R86.2@4656.38,4349.13 4656.38,4386.38 4725,4455 ; R86.2@4691.97,4354.52 cw(c4807.91,4372.08) 4725,4455 ; 5247.65,4787.65 cw(c5310.94,4724.36) R89.1@5310.94,4813.87 ; 5278.38,4818.38 cw(c5310.94,4785.82) R89.1@5310.94,4831.87 ; R89.1@5298.28,4851 R89.1@5304.64,4844.64 ; R89.1@5311.5,4844.27 cw(c5345.89,4846.24) R89.1@5321.53,4870.59 ; R89.1@5329.47,4845.3 cw(c5399.63,4849.31) 5349.94,4899 ; 5524.18,4880.1 ccw(c5565.94,4921.86) R91.2@5565.94,4862.8 ; R91.2@5538.44,4865.84 cw(c5516.84,4844.24) R91.2@5547.39,4844.24 ; R91.2@5565.94,4838.33 5505.28,4899 5349.94,4899 ; 4725,4455 4940,4455 5115,4630 5155,4630 5215,4690 5215,4755 R89.1@5304.64,4844.64 ; R89.1@5304.64,4844.64 R89.1@5310.94,4838.33 5310.94,4860 5349.94,4899
NetR87_2: R87.2 R111.2 R116.2 | length 834.7
  Top Layer w18: R111.2@5120,5000 R116.2@5310.94,5000 5375.94,4935 5495,4935 5560,5000 R87.2@5565.94,5000 ; R111.2@5145.46,4974.54 cw(c5206.91,4913.09) 5206.91,5000 cw(c5206.91,5086.91) R111.2@5145.46,5025.46 ; R116.2@5297.82,4986.88 ccw(c5266.14,4955.19) 5266.14,5000 ccw(c5266.14,5044.81) R116.2@5297.82,5013.12 ; R116.2@5310.94,4975.54 cw(c5310.94,4916.47) 5352.71,4958.24 ; R116.2@5329.5,4994.09 ccw(c5360.05,4994.09) R116.2@5338.45,4972.49 ; 5514.03,4954.03 cw(c5565.94,4902.12) R87.2@5565.94,4975.54
NetR91_1: R91.1 R92.2 U13.3 | length 842.1
  Top Layer w18: R91.1@5684.06,4838.33 5755.72,4910 5872.39,4910 R92.2@5944.06,4838.33 6031.67,4838.33 6085,4785 U13.3@6233.54,4785 ; R91.1@5684.06,4862.8 ccw(c5684.06,4921.86) 5725.82,4880.1 ; R91.1@5702.61,4844.24 cw(c5733.16,4844.24) R91.1@5711.56,4865.84 ; 5902.29,4880.1 ccw(c5944.06,4921.86) R92.2@5944.06,4862.8 ; R92.2@5916.55,4865.84 cw(c5894.95,4844.24) R92.2@5925.5,4844.24 ; R92.2@5957.18,4825.21 cw(c5988.86,4793.53) 5988.86,4838.33 cw(c5988.86,4883.14) R92.2@5957.18,4851.46
NetR105_1: R105.1 R106.2 U50.4 | length 503.7
  Top Layer w40: U50.4@5691.93,6453.74 5754.06,6515.87 R106.2@5754.06,6740 R105.1@5850.94,6740 ; U50.4@5691.93,6478.74 ccw(c5691.93,6539.1) 5734.61,6496.42 ccw(c5777.29,6453.74) U50.4@5716.93,6453.74
NetR109_1: R109.1 R113.2 | length 464.3
  Bottom Layer w18: R109.1@4620,4694 cw(c4620,4607.09) 4681.46,4668.54 cw(c4742.91,4730) R109.1@4656,4730 ; R109.1@4620,4730 4735,4615 ; R113.2@4775.72,4594.06 ccw(c4735,4564.95) 4735,4615 ; R113.2@4775.72,4635.94 cw(c4735,4665.05) 4735,4615 ; R113.2@4805,4615 4735,4615
NetR111_1: R111.1 R115.2 | length 453.5
  Bottom Layer w18: R111.1@4620,4964 cw(c4620,4877.09) 4681.46,4938.54 cw(c4742.91,5000) R111.1@4656,5000 ; R111.1@4620,5000 4740,4880 ; R115.2@4774.48,4860.9 ccw(c4740,4839.32) 4740,4880 ; R115.2@4774.48,4899.1 cw(c4740,4920.68) 4740,4880 ; R115.2@4805,4880 4740,4880
R_M: P14PANEL.6 R39.2 R97.2 | length 2535.5
  Top Layer w18: v1@5094.24,5901.12 cw(c5070.71,5880.39) 5101,5872.27 cw(c5138.99,5862.09) v1@5120.09,5896.58 ; v1@5095.15,5900.15 cw(c5069.09,5874.09) 5105.94,5874.09 ; v1@5097.45,5898.16 cw(c5063.99,5853.24) R97.2@5120,5853.24 ; R97.2@5105.55,5846.3 ccw(c5070.66,5881.19) 5120,5881.19 ; R97.2@5105.94,5854.51 cw(c5170.49,5854.51) v1@5124.85,5900.15 ; v1(5110,5915) 5110,5920 5120,5930 v1@5120,5915 ; v1@5110.62,5935.99 ccw(c5112.63,6004.37) 5161,5956 ; R97.2@5119.07,5859.03 cw(c5150.75,5890.71) 5105.94,5890.71 cw(c5061.14,5890.71) 5092.82,5859.03 ccw(c5027.2,5924.65) v1@5120,5924.65 ; v1@5131,5915 cw(c5157.56,5915) 5138.78,5933.78 ; R39.2@5385.32,5859.03 ccw(c5353.64,5890.71) 5398.44,5890.71 ccw(c5443.25,5890.71) R39.2@5411.57,5859.03 ; R39.2@5398.44,5840 5398.44,5901.56 5344,5956 5161,5956 ; v1@5120,5915 5161,5956 ; v1@5120,5915 5105.94,5900.94 R97.2@5105.94,5840 5120,5854.06 v1@5120,5915
  Bottom Layer w18: P14PANEL.6@4153.54,5855.91 4244.09,5855.91 4295,5805 4295,5730 4415,5610 4840,5610 5060,5830 5060,5865 v1(5110,5915) ; P14PANEL.6@4181.2,5835.75 cw(c4229.85,5787.1) 4229.85,5855.91 cw(c4229.85,5924.71) P14PANEL.6@4181.2,5876.06 ; v1@5089,5915 cw(c5038.3,5915) 5074.15,5879.15 cw(c5110,5843.3) v1@5110,5894
SENSE: D16.1 L2.2 P15RL.8 | length 1515.1
  Top Layer w32: D16.1@4809.49,6315.51 ccw(c4759.99,6365.01) 4830,6365.01 ccw(c4900.01,6365.01) D16.1@4850.51,6315.51 ; D16.1@4830,6295 4830,6520 5080.32,6770.32 P15RL.8@5080.32,6870.08 ; P15RL.8@5065.11,6847.38 cw(c5028.41,6810.67) 5080.32,6810.67 cw(c5132.22,6810.67) P15RL.8@5095.52,6847.38
  Bottom Layer w40: L2.2@4555,6580 4635,6580 4830,6385 D16.1@4830,6295 ; L2.2@4574.45,6560.55 cw(c4621.39,6513.61) 4621.39,6580 cw(c4621.39,6646.39) L2.2@4574.45,6599.45 ; D16.1@4812.32,6312.68 ccw(c4769.64,6355.36) 4830,6355.36 ccw(c4890.36,6355.36) D16.1@4847.68,6312.68
VCC: C31.1 C32.2 C38.2 C43.2 C99.2 D66.1 P13KB.2 P16AN.9 PN1.1 U51.3 | length 6587.7
  Top Layer w40: P16AN.9@6742.34,4150.3 ccw(c6794.74,4138.05) 6756.69,4100 ; D66.1@6744.04,6556.83 ccw(c6681.36,6619.5) 6770,6619.5 ; P16AN.9@6744.32,4133.67 cw(c6714.44,4103.8) 6756.69,4103.8 cw(c6798.94,4103.8) P16AN.9@6769.07,4133.67 ; D66.1@6747.99,6545 6770,6567.01 U51.3@6770,6695 6830,6695 6874.06,6739.06 C99.2@6874.06,6880 ; P16AN.9@6756.69,4153.54 6756.69,4093.31 6800,4050 ; U51.3@6757.63,6670.13 cw(c6727.75,6640.25) 6770,6640.25 cw(c6812.25,6640.25) U51.3@6782.37,6670.13 ; P16AN.9@6773.73,4142.06 ccw(c6869.64,4119.65) 6800,4050 ; U51.3@6782.37,6682.63 cw(c6812.25,6652.75) 6812.25,6695 cw(c6812.25,6737.25) U51.3@6782.37,6707.37 ; C31.1@7145,6725 7195,6725 ; C31.1@7159.68,6745.23 ccw(c7187.05,6782.95) 7220,6750 ; C31.1@7162.68,6707.32 cw(c7205.36,6664.64) 7205.36,6725 cw(c7205.36,6785.36) C31.1@7162.68,6742.68 ; C43.2@7337.96,6687.99 ccw(c7360.94,6710.97) C43.2@7360.94,6678.46 ; C32.2@7360.94,6570 C43.2@7360.94,6665 7300.94,6725 7195,6725 ; PN1.1@7418.33,6850.2 cw(c7388.46,6820.33) 7430.71,6820.33 cw(c7472.96,6820.33) PN1.1@7443.08,6850.2 ; 7430,6750 7430.71,6750.71 PN1.1@7430.71,6870.08 ; P13KB.2@7637.61,4743.53 ccw(c7607.73,4713.66) 7607.73,4755.91 ccw(c7607.73,4798.15) P13KB.2@7637.61,4768.28 ; P13KB.2@7677.35,4743.53 cw(c7707.23,4713.66) 7707.23,4755.91 cw(c7707.23,4798.15) P13KB.2@7677.35,4768.28 ; 6800,4050 7305,4050 7770,4515 7770,4720 7734.09,4755.91 P13KB.2@7657.48,4755.91 7544.96,4755.91 C38.2@7539.06,4750 7539.06,5010.94 7520,5030 7520,6386.46 7570,6436.46 7570,6710 7530,6750 7220,6750 ; 7195,6725 ccw(c7195,6687.5) 7165,6710 cw(c7195,6687.5) 7195,6725 ; 7195,6725 cw(c7195,6762.5) 7165,6740 ccw(c7195,6762.5) 7195,6725 ; 7195,6725 7220,6750
  Bottom Layer w40: U51.3@6770,6695 7115,6695 C31.1@7145,6725 ; U51.3@6782.37,6682.63 cw(c6812.25,6652.75) 6812.25,6695 cw(c6812.25,6737.25) U51.3@6782.37,6707.37 ; 7012.22,6695 ccw(c7012.22,6857.78) C31.1@7127.32,6742.68 ; 7108.79,6695 ccw(c7108.79,6761.21) C31.1@7155.61,6714.39
Y_M: P14PANEL.8 R48.2 R110.2 | length 1423.4
  Top Layer w18: R110.2@4795.2,5378.96 cw(c4780.41,5358.15) 4805.94,5358.15 ; R110.2@4805.94,5400 4805.94,5358.14 ; R110.2@4816.69,5378.96 ccw(c4831.48,5358.15) 4805.94,5358.15 ; 5067.85,5346.94 ccw(c5020.7,5394.09) R48.2@5087.38,5394.09 ; R48.2@5089.73,5368.82 cw(c5105.94,5352.61) R48.2@5105.94,5375.54 ; R48.2@5098.44,5400 5098.44,5377.53 5020.91,5300 4864.09,5300 4805.94,5358.14
  Top Layer w30: P14PANEL.8@4153.54,5655.91 4354.09,5655.91 4610,5400 R110.2@4805.94,5400 ; P14PANEL.8@4176.95,5640 cw(c4215.36,5601.59) 4215.36,5655.91 cw(c4215.36,5710.23) P14PANEL.8@4176.95,5671.82 ; R110.2@4797.06,5391.12 ccw(c4775.62,5369.68) 4775.62,5400 ccw(c4775.62,5430.32) R110.2@4797.06,5408.88
pads on no net: P13KB.3 P13KB.4 P13KB.5 P13KB.6 P13KB.7 P13KB.8 P13KB.9 P13KB.10 P13KB.11 P13KB.12 P13KB.13 P13KB.14 P13KB.15 P13KB.16 P13KB.17 P13KB.18 P13KB.19 P13KB.20 P14PANEL.3 P14PANEL.5 P14PANEL.7 P14PANEL.9 P14PANEL.11 P14PANEL.13 P14PANEL.15 P14PANEL.17 P15RL.1 P15RL.2 P15RL.3 P15RL.4 P15RL.5 P15RL.6 P15RL.7 P15RL.9 P15RL.11 P16AN.8 PN1.2 U12.12 U12.13 U12.14
copper on no net: | length 28346.5
  Top Layer w8: 3937.01,3937.01 7874.02,3937.01 7874.02,7086.61 3937.01,7086.61 3937.01,3937.01
  Bottom Layer w8: 3937.01,3937.01 7874.02,3937.01 7874.02,7086.61 3937.01,7086.61 3937.01,3937.01

## Polygon pours and split planes (outlines as drawn)
NetC37_1 on Bottom Layer "Top Layer-No Net" (solid, remove dead copper, pour order 59): 5287,4431 5287,4254 5307,4234 5273,4268 5255,4268 5250,4268 5213,4305 5202,4316 5140,4316 5140,4385 5131,4394 5229,4394 5274,4439
GND on Bottom Layer "Top Layer-No Net" (solid, remove dead copper, pour order 39): 4160,6320 4345,6320 4365,6340 4365,6395 4335,6425 4290,6425 4140,6425 4110,6395 4110,6320
BAT on Bottom Layer "Top Layer-No Net" (solid, remove dead copper, pour order 38): 4790,6610 4720,6680 4550,6680 4210,6680 4160,6730 4160,6815 4175,6830 4195,6850 4275,6850 4350,6775 4680,6775 4875,6775 4900,6750 5180,6750 5295,6635 5300,6630 5300,6415 5350,6365 5475,6365 5520,6365 5540,6345 5540,6240 5530,6230 5310,6230 5300,6230 5225,6305 5190,6340 5190,6490 5190,6545 5125,6610 4790,6610
SENSE on Bottom Layer "Top Layer-No Net" (solid, remove dead copper, pour order 37): 4750,6275 4750,6410 4690,6470 4665,6495 4560,6495 4535,6495 4500,6530 4500,6610 4520,6630 4525,6635 4630,6635 4635,6635 4735,6535 4895,6375 4895,6270 4895,6255 4875,6235 4790,6235 4770,6235 4750,6255
BAT+ on Bottom Layer "Top Layer-No Net" (solid, remove dead copper, pour order 36): 4150,6220 4580,6220 4630,6270 4640,6280 4640,6385 4640,6390 4595,6435 4510,6435 4500,6425 4500,6340 4455,6295 4450,6290 4150,6290
NetD61_2 on Bottom Layer "Top Layer-No Net" (solid, remove dead copper, pour order 40): 5600,6450 5600,6505 5650,6555 5780,6555 5830,6505 5830,6405 5910,6325 5960,6275 6045,6275 6085,6275 6125,6315 6125,6560 6035,6650 5560,6650 5490,6580 5470,6560 5470,6450 5510,6410 5560,6410
BAT on Bottom Layer "Top Layer-No Net" (solid, remove dead copper, pour order 48): 4480,6680 4430,6680 4375,6625 4195,6625 4170,6650 4160,6660 4160,6730 4480,6730
GND on Bottom Layer "Top Layer-No Net" (solid, remove dead copper, pour order 50): 6710,6395 6410,6395 6350,6455 6245,6455 6205,6495 6170,6530 6170,6690 6170,6895 6235,6960 6260,6985 6835,6985 7180,6985 7260,6905 7265,6900 7265,6860 7265,6855 7235,6825 6770,6825 6705,6760 6705,6645 6680,6620 6635,6620 6635,6760 6595,6800 6510,6800 6495,6785 6470,6760 6470,6690 6470,6645 6505,6610 6605,6610 6610,6610 6655,6655 6705,6605 6705,6500 6705,6440 6730,6415
GND on Bottom Layer "Top Layer-No Net" (solid, remove dead copper, pour order 47): 5035,6535 5085,6535 5120,6500 5125,6495 5125,6385 5125,6275 5215,6185 5545,6185 5580,6220 5580,6325 5595,6340 5605,6350 5735,6350 5785,6350 5810,6325 5810,6275 5835,6250 5945,6250 5975,6220 5995,6200 6465,6200 6520,6200 6555,6165 6580,6140 6650,6070 6730,6070 6735,6070 6775,6110 6775,6330 6710,6395 6610,6495 6610,6610 6635,6635 6635,6685 6705,6685 6705,6600 6760,6545 6880,6545 6905,6545 6955,6495 6955,6235 6955,6120 7060,6015 7170,6015 7245,5940 7245,5845 7175,5775 7030,5775 6930,5875 6890,5915 6670,5915 6650,5915 6570,5995 5940,5995 5805,6130 5790,6145 5105,6145 5060,6145 4975,6230 4960,6245 4960,6380 4960,6495 5000,6535
GND on Bottom Layer "Top Layer-No Net" (solid, remove dead copper, pour order 52): 7170,6825 7240,6755 7240,6675 7240,6635 7190,6585 7105,6585 7080,6560 7075,6555 7075,6490 7105,6460 7195,6460 7270,6460 7340,6390 7340,5830 7265,5755 7240,5730 7080,5730 6805,5730 6785,5710 6615,5710 6470,5710 6405,5775 6360,5820 6230,5820 5665,5820 5625,5780 5620,5775 5620,5515 5665,5470 5735,5470 5760,5495 5855,5495 5865,5495 5890,5470 5890,5425 5890,5415 5845,5370 5840,5365 5765,5365 5740,5340 5740,5265 5765,5240 5835,5170 5865,5170 5900,5170 5925,5145 5975,5145 6015,5185 6040,5210 6100,5210 6110,5210 6130,5190 6130,5115 6100,5085 6100,4995 6165,4930 6270,4930 6455,4930 6460,4935 6480,4955 6480,5065 6480,5135 6410,5205 6385,5230 6075,5230 6010,5230 5985,5205 5915,5205 5895,5225 5895,5305 5925,5335 5960,5370 6055,5370 6075,5350 6265,5350 6645,5350 6670,5325 6670,5270 6695,5245 6710,5230 6780,5230 6805,5230 6855,5280 6880,5305 7075,5305 7365,5305 7430,5370 7430,6080 7430,6580 7315,6695 7315,6740 7285,6770 7265,6790 7265,6895 7215,6945 7170,6945
VCC on Bottom Layer "Top Layer-No Net" (solid, remove dead copper, pour order 53): 6735,6695 6735,6740 6780,6785 7150,6785 7195,6740 7195,6680 7165,6650 7155,6640 7015,6640 6760,6640 6740,6660
VCC on Bottom Layer "Top Layer-No Net" (solid, remove dead copper, pour order 55): 7395,6890 7395,6920 7425,6950 7430,6955 7525,6955 7575,6905 7575,6500 7575,4815 7600,4790 7670,4790 7670,4720 7565,4720 7515,4770 7490,4795 7490,5885 7490,6660 7435,6715 7395,6755 7395,6880
GND on Bottom Layer "Top Layer-No Net" (solid, remove dead copper, pour order 56): 7240,5730 7310,5800 7310,5910 7310,6025 7255,6080 7255,6410 7200,6465 7285,6550 7355,6550 7385,6520 7385,6390 7385,5665 7370,5650 7230,5650 7230,5725 7225,5730
GND on Bottom Layer "Top Layer-No Net" (solid, remove dead copper, pour order 57): 7430,5370 7430,4775 7505,4700 7515,4690 7680,4690 7700,4670 7700,4620 7700,4500 7670,4470 7595,4395 7275,4395 7120,4395 7055,4330 7055,4195 6975,4115 6965,4115 6895,4045 6865,4015 6800,4015 6800,4040 6820,4060 6820,4175 6820,4295 6745,4370 6735,4380 6515,4380 6395,4380 6275,4500 6200,4575 6200,4680 6200,4745 6240,4785 6265,4810 6700,4810 6740,4810 6820,4890 6895,4965 7010,4965 7060,4965 7140,5045 7145,5050 7145,5150 7145,5200 7015,5330 7065,5380 7065,5510 7425,5510 7430,5515
GND on Bottom Layer "Top Layer-No Net" (solid, remove dead copper, pour order 61): 6865.26,4015.26 6950.26,4015.26 7040,4105 7055,4120 7055,4195 6985,4195 6975,4205 6850,4080 6850,4040 6850,4020 6845,4015
+9V on Bottom Layer "Top Layer-No Net" (solid, remove dead copper, pour order 63): 6230,6305 6270,6265 6415,6265 6575,6265 6615,6225 6635,6205 6695,6205 6730,6240 6730,6280 6730,6305 6685,6350 6380,6350 6370,6360 6360,6370 6280,6370 6255,6370 6230,6345
DGY on Bottom Layer "Top Layer-No Net" (solid, remove dead copper, pour order 64): 4155,4690 4290,4690 4340,4640 4305,4605 4305,4570 4180,4570 4120,4630
DGB on Bottom Layer "Top Layer-No Net" (solid, remove dead copper, pour order 65): 4155,4820 4305,4820 4340,4855 4305,4890 4305,4925 4295,4915 4280,4915 4270,4905 4255,4890 4155,4890
NetR109_1 on Bottom Layer "Top Layer-No Net" (solid, remove dead copper, pour order 66): 4650,4760 4750,4660 4810,4660 4810,4575 4805,4570 4720,4570 4595,4695
NetR111_1 on Bottom Layer "Top Layer-No Net" (solid, remove dead copper, pour order 67): 4650,5030 4755,4925 4805,4925 4805,4835 4725,4835 4590,4970
NetR79_2 on Bottom Layer "Top Layer-No Net" (solid, remove dead copper, pour order 68): 5075,4730 5075,4610 5195,4490 5230,4525 5230,4535 5230,4680 5150,4760
GND on Bottom Layer "Top Layer-No Net" (solid, remove dead copper, pour order 62): 6820,4115 6775,4070 6720,4070 5885,4070 5845,4110 5705,4250 5620,4250 5555,4250 5525,4280 5525,4355 5545,4375 5560,4390 5650,4390 5815,4390 5875,4450 5875,4520 5925,4570 5940,4585 5940,4830 5940,4960 5875,5025 5795,5025 5750,5070 5530,5290 5530,5435 5530,5900 5515,5915 5515,6005 5485,6035 5480,6035 5380,6035 5280,5935 4745,5400 4650,5400 4565,5400 4525,5360 4525,5255 4575,5205 4715,5205 5140,5205 5290,5055 5315,5030 5315,4600 5315,4290 5420,4185 5590,4015 5855,4015 6950,4015 6980,4045 6990,4055 6990,4120 6990,4135 6910,4215 6905,4220 6820,4220
+9V on Top Layer "Top Layer-No Net" (solid, remove dead copper, pour order 44): 6685,6200 6250,6200 6190,6260 6190,6355 6215,6380 6220,6385 6315,6385 6395,6305 6690,6305 6690,6245 6735,6200
+9V on Top Layer "Top Layer-No Net" (solid, remove dead copper, pour order 42): 5480,6835 5910,6835 5935,6810 5945,6800 5945,6715 5950,6710 5980,6710 6050,6710 6170,6590 6275,6485 6500,6485 6545,6440 6655,6330 6655,6290 6655,6230 6685,6200 7130,6200 7195,6265 7195,6360 7165,6390 7050,6390 7020,6360 6980,6320 6845,6320 6665,6500 6665,6575 6625,6615 6605,6635 6605,6735 6585,6755 6585,6865 6585,6915 6575,6925 6525,6925 5475,6925 5455,6905 5450,6900 5450,6860
GND on Top Layer "Top Layer-No Net" (solid, remove dead copper, pour order 41): 4150,6320 4225,6320 4295,6250 4390,6155 4650,6155 5005,6155 5105,6255 5135,6285 5135,6540 5255,6660 5560,6660 5615,6660 5660,6705 5660,6775 5635,6800 5340,6800 5320,6820 5315,6825 5315,6865 5245,6865 5245,6825 5220,6800 5190,6800 4990,6600 4990,6420 4990,6290 4930,6230 4495,6230 4420,6305 4300,6425 4185,6425 4140,6425 4110,6395 4110,6380
NetR105_1 on Top Layer "Top Layer-No Net" (solid, remove dead copper, pour order 43): 5695,6400 5750,6400 5805,6455 5815,6465 5815,6645 5875,6705 5875,6740 5845,6770 5730,6770 5730,6555 5660,6485 5660,6460 5650,6450 5650,6440 5655,6435 5660,6430 5660,6425 5685,6400
VCC on Top Layer "Top Layer-No Net" (solid, remove dead copper, pour order 45): 6725,6575 6735,6585 6735,6690 6735,6735 6815,6815 6835,6835 6835,6875 6835,6915 6845,6925 6910,6925 6920,6915 6920,6745 6860,6685 6860,6570 6815,6525 6805,6515 6725,6515
GND on Top Layer "Top Layer-No Net" (solid, remove dead copper, pour order 46): 6705,6695 6705,6770 6740,6805 6780,6845 6780,6900 6780,6930 6800,6950 6930,6950 6950,6930 6950,6835 6950,6540 7025,6465 7040,6450 7240,6450 7485,6450 7525,6490 7525,6675 7505,6695 7455,6695 7455,6540 7425,6510 7415,6500 7280,6500 7195,6585 7095,6585 7045,6635 7045,6740 7045,6770 7095,6820 7250,6820 7270,6840 7270,6930 7240,6960 7170,7030 6730,7030 6635,6935 6635,6695
GND on Top Layer "Top Layer-No Net" (solid, remove dead copper, pour order 49): 5005,6155 5795,6155 5830,6155 5965,6020 6020,5965 6450,5965 6620,5965 6780,5965 6850,5965 6915,6030 6915,6080 6855,6140 6045,6140 5970,6215 5835,6350 5755,6350 5605,6350 5580,6325 5580,6235 5555,6210 5215,6210 5135,6290 5085,6340 5050,6340 5050,6295 4960,6205 4950,6195 4950,6155
GND on Top Layer "Top Layer-No Net" (solid, remove dead copper, pour order 51): 6555,5965 6610,5910 6705,5910 6870,5910 6910,5950 6915,5955 6915,6030 6865,6080 6800,6080 6615,6080 6555,6020
VCC on Top Layer "Top Layer-No Net" (solid, remove dead copper, pour order 54): 7355,6535 7390,6535 7395,6540 7400,6545 7400,6655 7400,6705 7415,6720 7420,6725 7465,6725 7515,6725 7540,6700 7550,6690 7550,6640 7590,6640 7620,6670 7620,6710 7620,6855 7550,6925 7535,6940 7445,6940 7420,6940 7395,6915 7395,6830 7375,6810 7340,6775 7270,6775 7120,6775 7110,6765 7090,6745 7090,6730 7090,6655 7110,6635 7125,6620 7200,6620 7225,6620 7300,6545 7310,6535 7340,6535
VCC on Top Layer "Top Layer-No Net" (solid, remove dead copper, pour order 58): 6720,4150 6720,4050 6750,4020 6780,3990 6945,3990 7380,3990 7485,4095 7810,4420 7810,4665 7810,4735 7765,4780 7755,4790 7665,4790 7600,4790 7570,4820 7570,6405 7590,6425 7590,6515 7590,6640 7620,6670 7605,6655 7550,6655 7550,6455 7505,6410 7495,6400 7495,6155 7495,4800 7515,4780 7515,4765 7555,4725 7560,4720 7670,4720 7720,4720 7740,4700 7740,4590 7720,4570 7570,4570 7515,4515 7500,4500 7500,4415 7500,4295 7380,4175 7280,4075 6815,4075 6790,4100 6790,4155
+9V on Top Layer "Top Layer-No Net" (solid, remove dead copper, pour order 69): 7115,6200 7185,6200 7235,6150 7259.06,6174.06 7265,6174.06 7255.94,6174.06 7170,6260 7165,6265 7100,6265 7100,6200
+9V on Top Layer "Top Layer-No Net" (solid, remove dead copper, pour order 70): 7227,6158 7235,6150 7280,6150 7280,6180 7275,6185 7200,6185
GND on Top Layer "Top Layer-No Net" (solid, pour order 73): 6800,4555 6815,4555 6820,4550 6820,4150 6820,4145 6855,4110 7225,4110 7440,4325 7440,4540 7490,4590 7520,4620 7665,4620 7665,4685 7660,4690 7465,4690 7445,4710 7440,4715 7440,4905 7440,6405 7525,6490 7335,6490 7320,6475 7360,6435 7360,5990 7360,5860 7295,5795 7220,5720 7220,5655 7220,5150 7335,5035 7360,5010 7360,4820 7255,4715 7255,4280 7255,4235 7215,4195 7050,4195 7005,4240 7005,4535 6970,4570 6945,4595 6805,4595
GND on Top Layer "Top Layer-No Net" (solid, pour order 75): 7195,6450 7365,6280 7415,6280 7415,6435 7405,6445 7375,6475 7300,6475 7195,6475

## Keep-outs
Keep-Out Layer:
  lines w8: 3937.01,3937.01 7874.02,3937.01 7874.02,7086.61 3937.01,7086.61 3937.01,3937.01
  lines w10: 7992.13,3937.01 7992.13,5629.92 9448.82,5629.92 9448.82,3937.01 7992.13,3937.01
  text "KEEPOUT LAYER" at 8036,5462.5 h70
  text "PCB INFORMATION:" at 8036,5260.62 h70
  text "PCB: FR-4" at 8036,5058.75 h70
  text "THICKNESS:35MICRONS" at 8036,4856.88 h70
  text "LAYERS TO PRINT:" at 8036,4655 h70
  text "TOP LAYER CU" at 8355,4520 h60
  text "TOP LEGEND" at 8355,4396.25 h60
  text "TOP SOLDER" at 8355,4272.5 h60
  text "BOTTOM SOLDER" at 8355,4148.75 h60
  text "BOTTOM LAYER CU" at 8355,4025 h60

## Other copper
Top Layer:
  text "TOP LAYER CU" at 7991,6980 h70
  text "COMPONENT SIDE" at 4815,6975 h50
Bottom Layer:
  text "SOLDER SIDE" at 5410,6975 h50
  text "BOTTOM LAYER CU" at 7991,6763.5 h70
  text "SIMCONS" at 7715,4260 h50
  text "A4" at 7710,4105 h100
  text "rev3.1" at 7710,4010 h60

## Silkscreen, mask and mechanical layers (free items; w line width, h text height)
Top Overlay:
  the board outline again, w10
  text "TOP LEGEND" at 7991,6547 h70
  text "SIMCONS CONTROL SYSTMES" at 7505,4925 h60 r90
  text "A4" at 7230,4280 h100
  text "rev3.1" at 7230,4190 h60
  text "S/N:" at 5340,3980 h90
Top Paste:
  the board outline again, w10
Bottom Paste:
  the board outline again, w10
Top Solder:
  the board outline again, w10
  text "TOP SOLDER" at 7991,6330.5 h70
Bottom Solder:
  the board outline again, w10
  text "BOTTOM SOLDER" at 7991,6114 h70